# Altium PCB Vector_Mini_ST.PcbDoc (part 1 of 2)
Units mm, origin at the board's own origin, x right, y up, seen from the top; angles counter-clockwise.
Board outline 50 x 50 mm, 4 copper layers (Top Layer, Gnd, Power, Bottom Layer), stack 1.01 mm thick; 146 components, 103 nets, 533 pads, 310 vias.
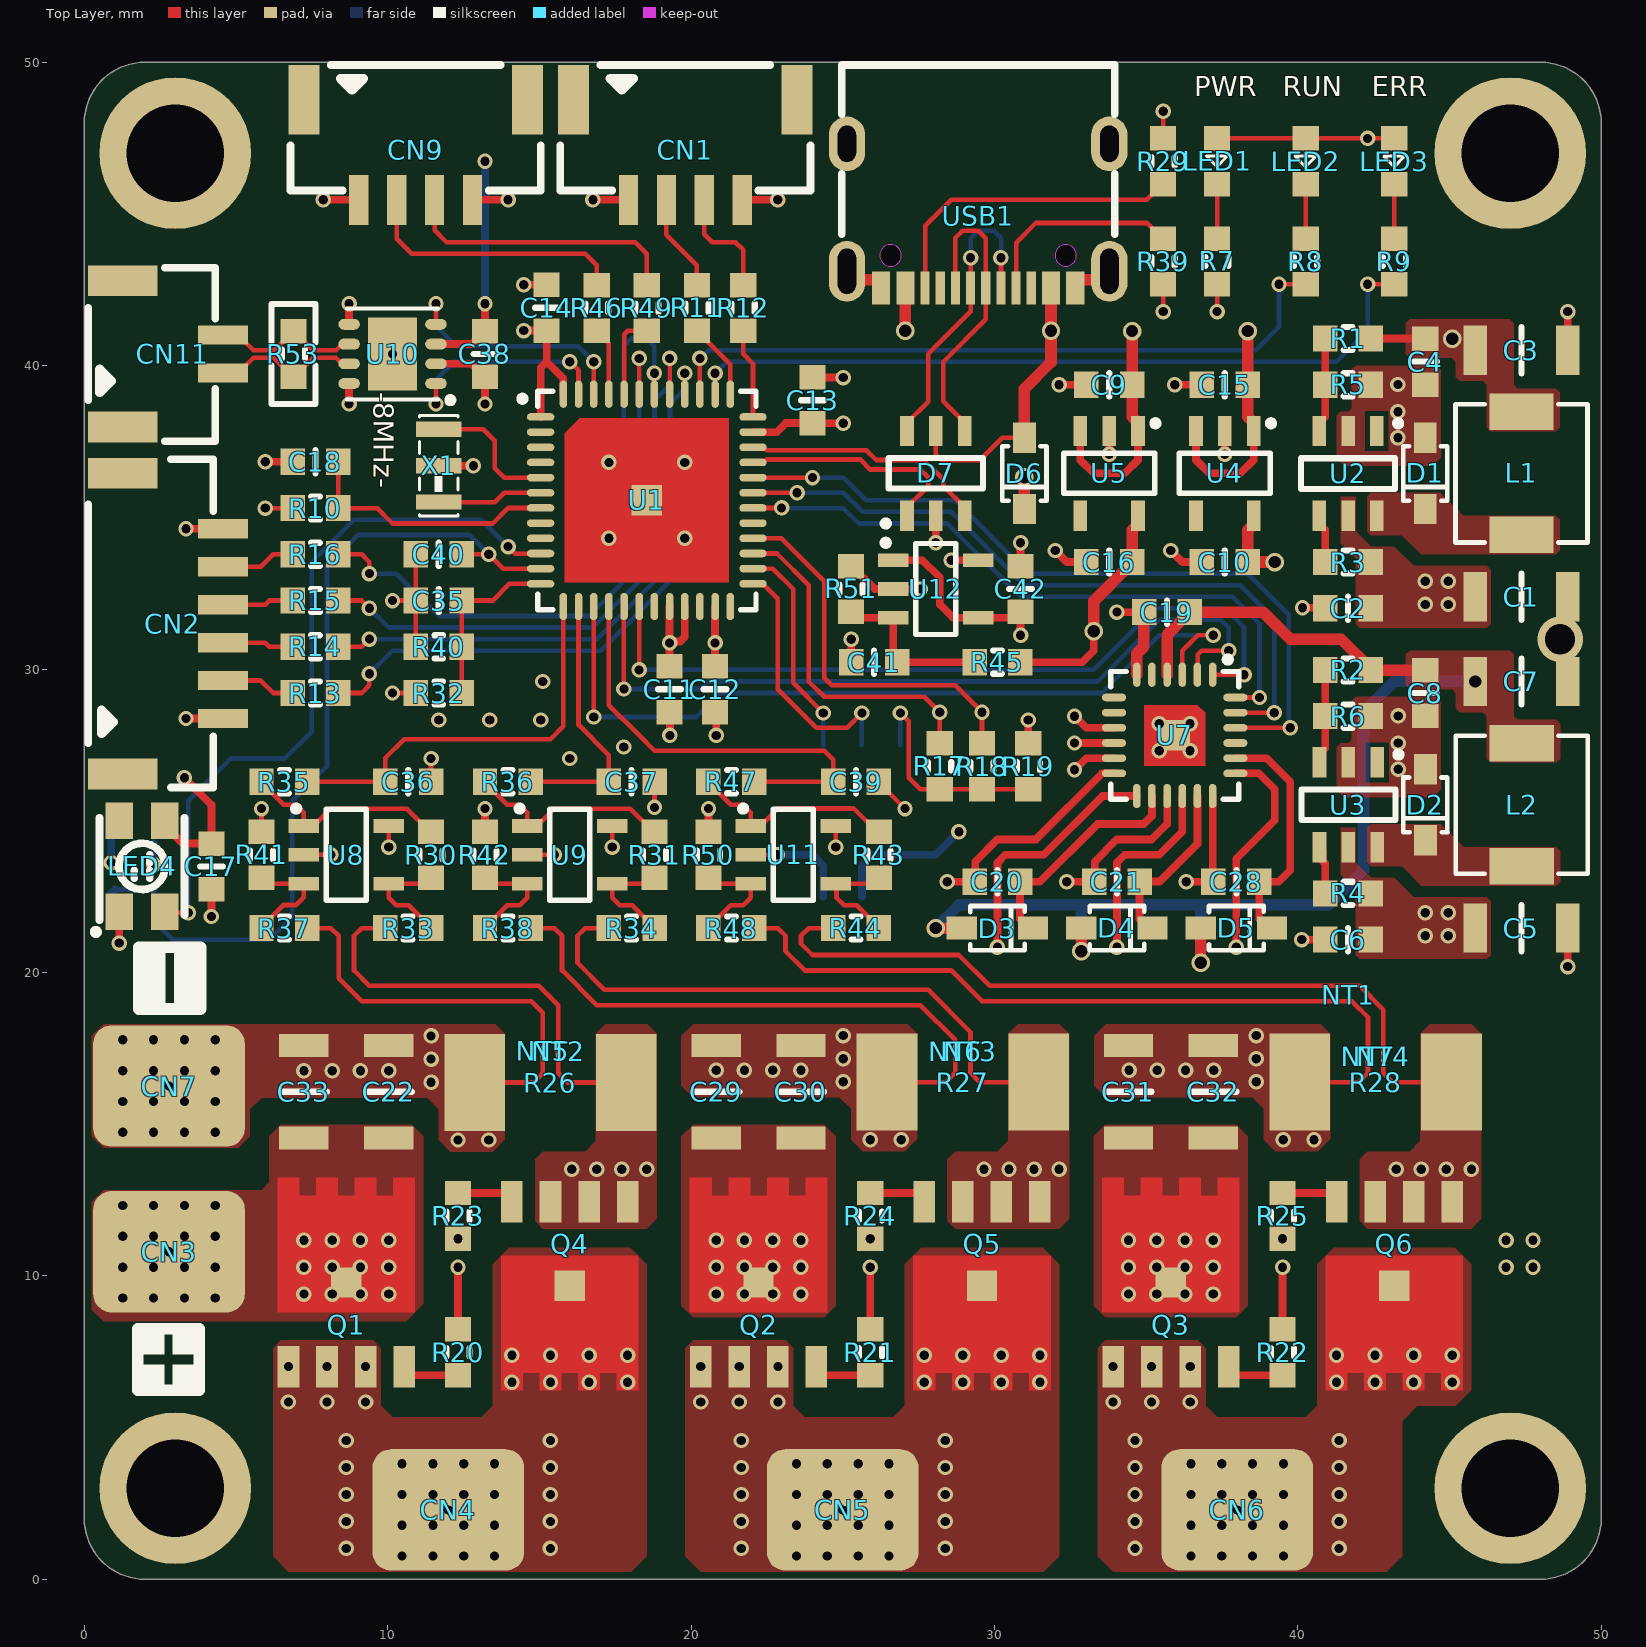
[diagram p0: Top Layer view]
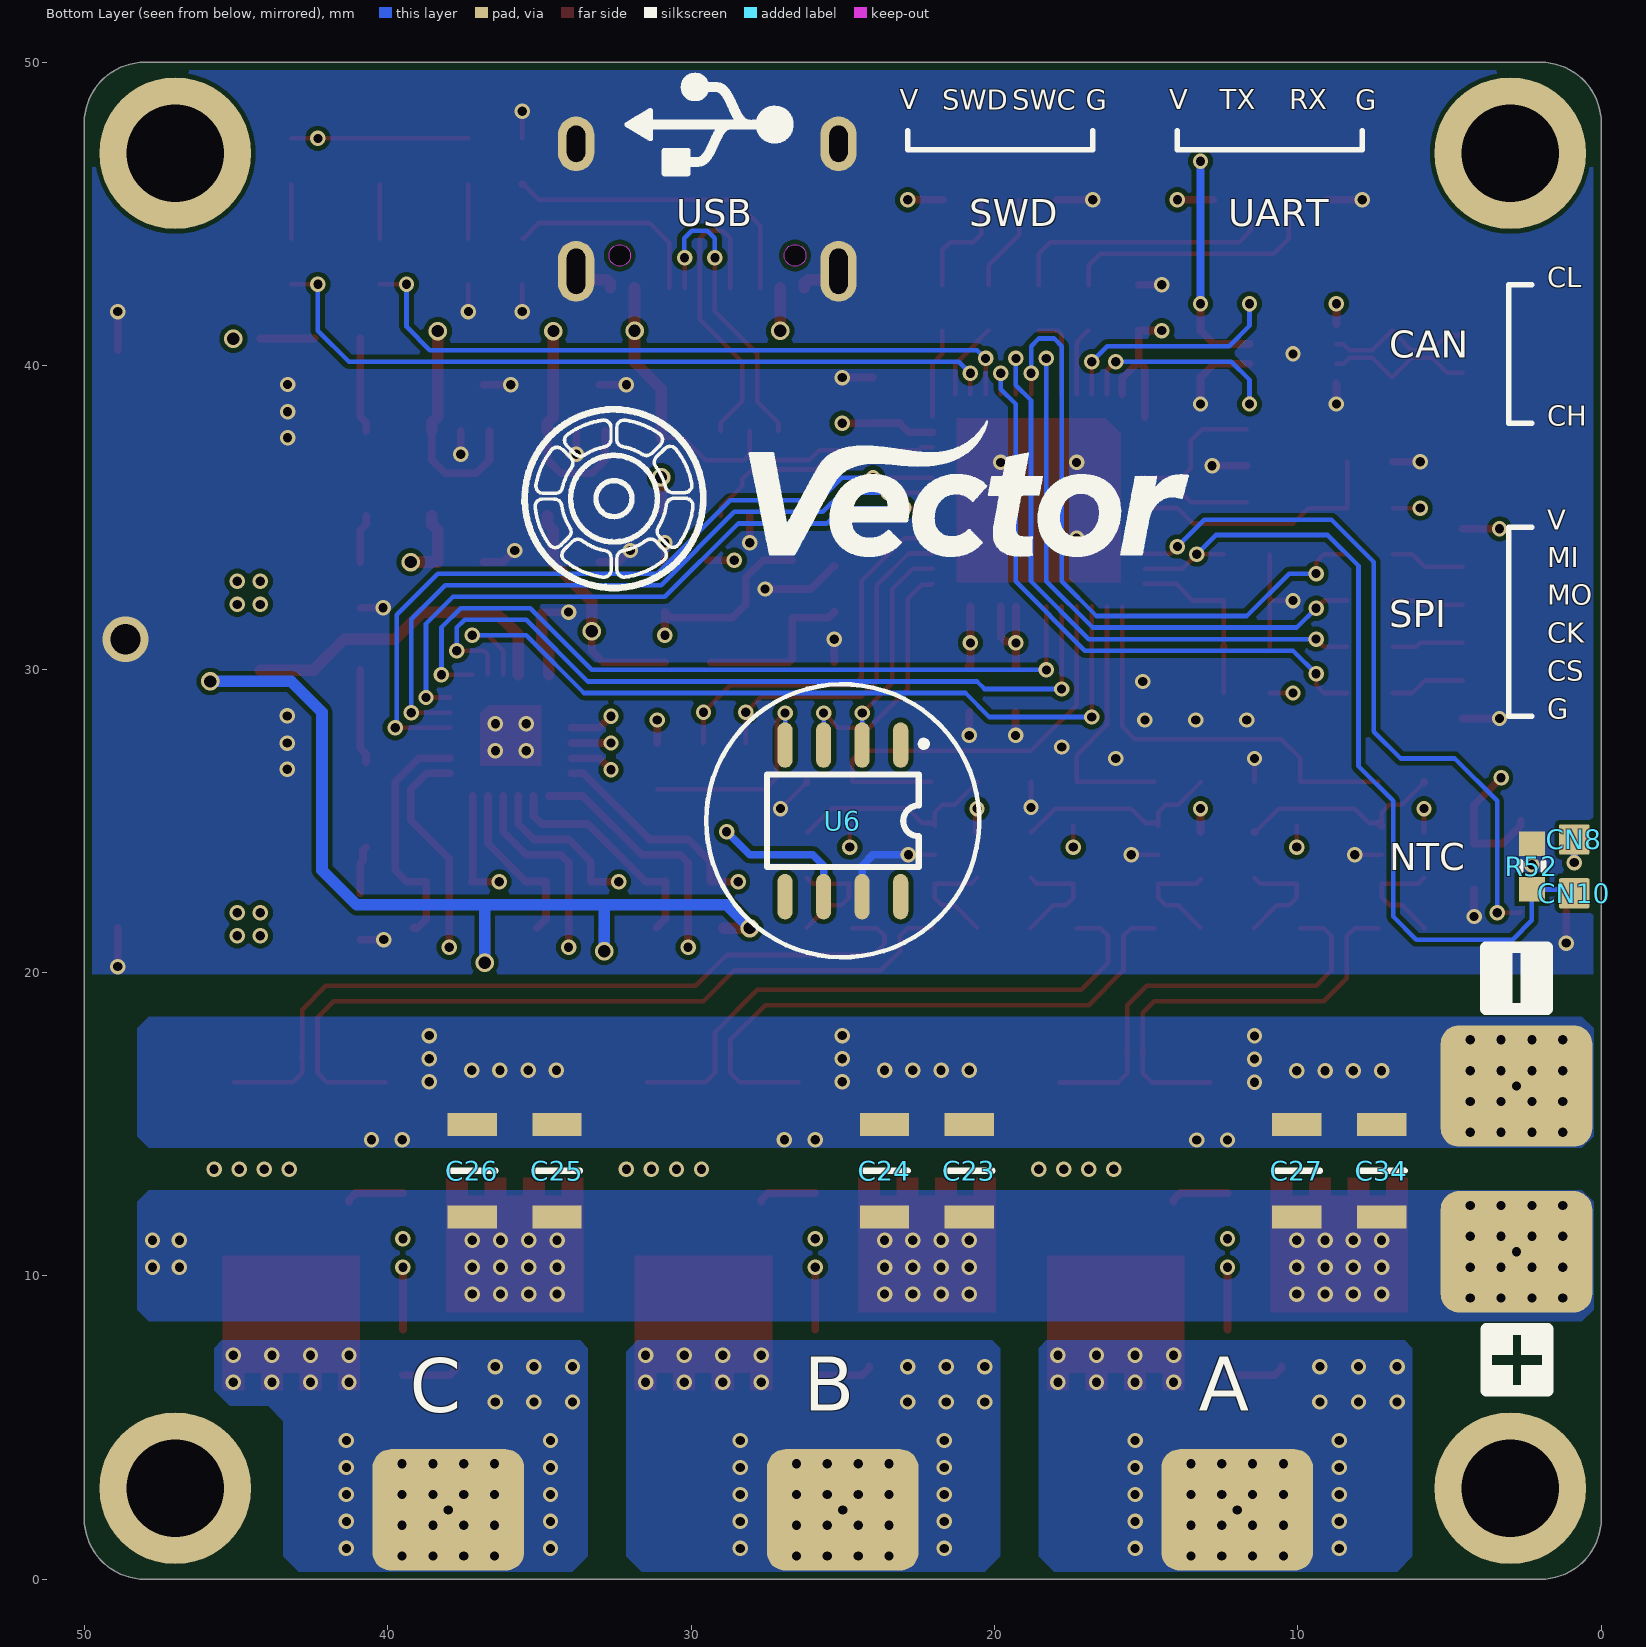
[diagram p1: Bottom Layer view, seen from below]
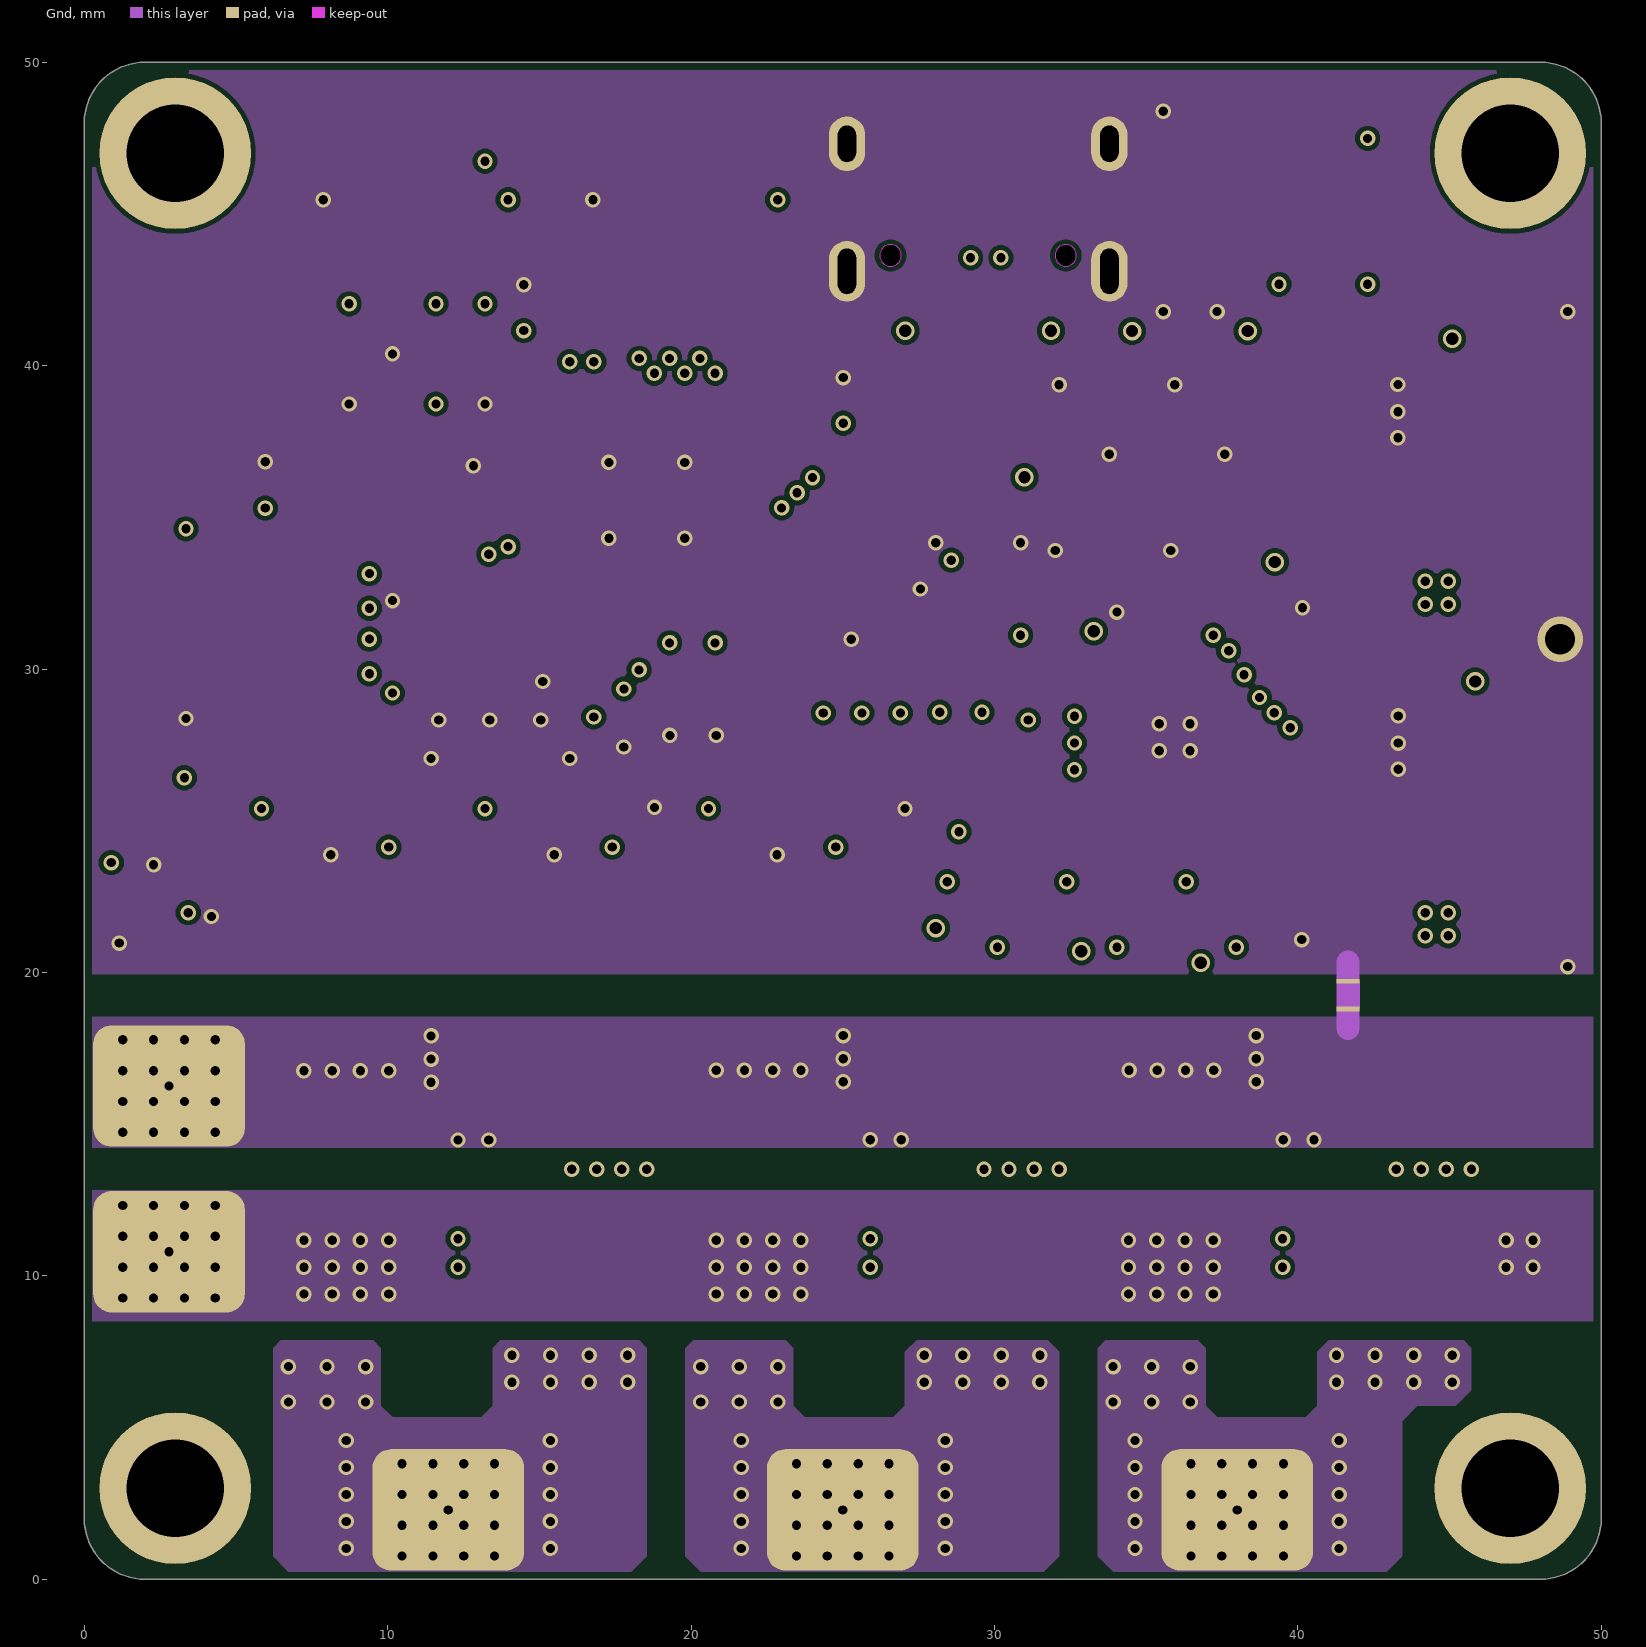
[diagram p2: Gnd]
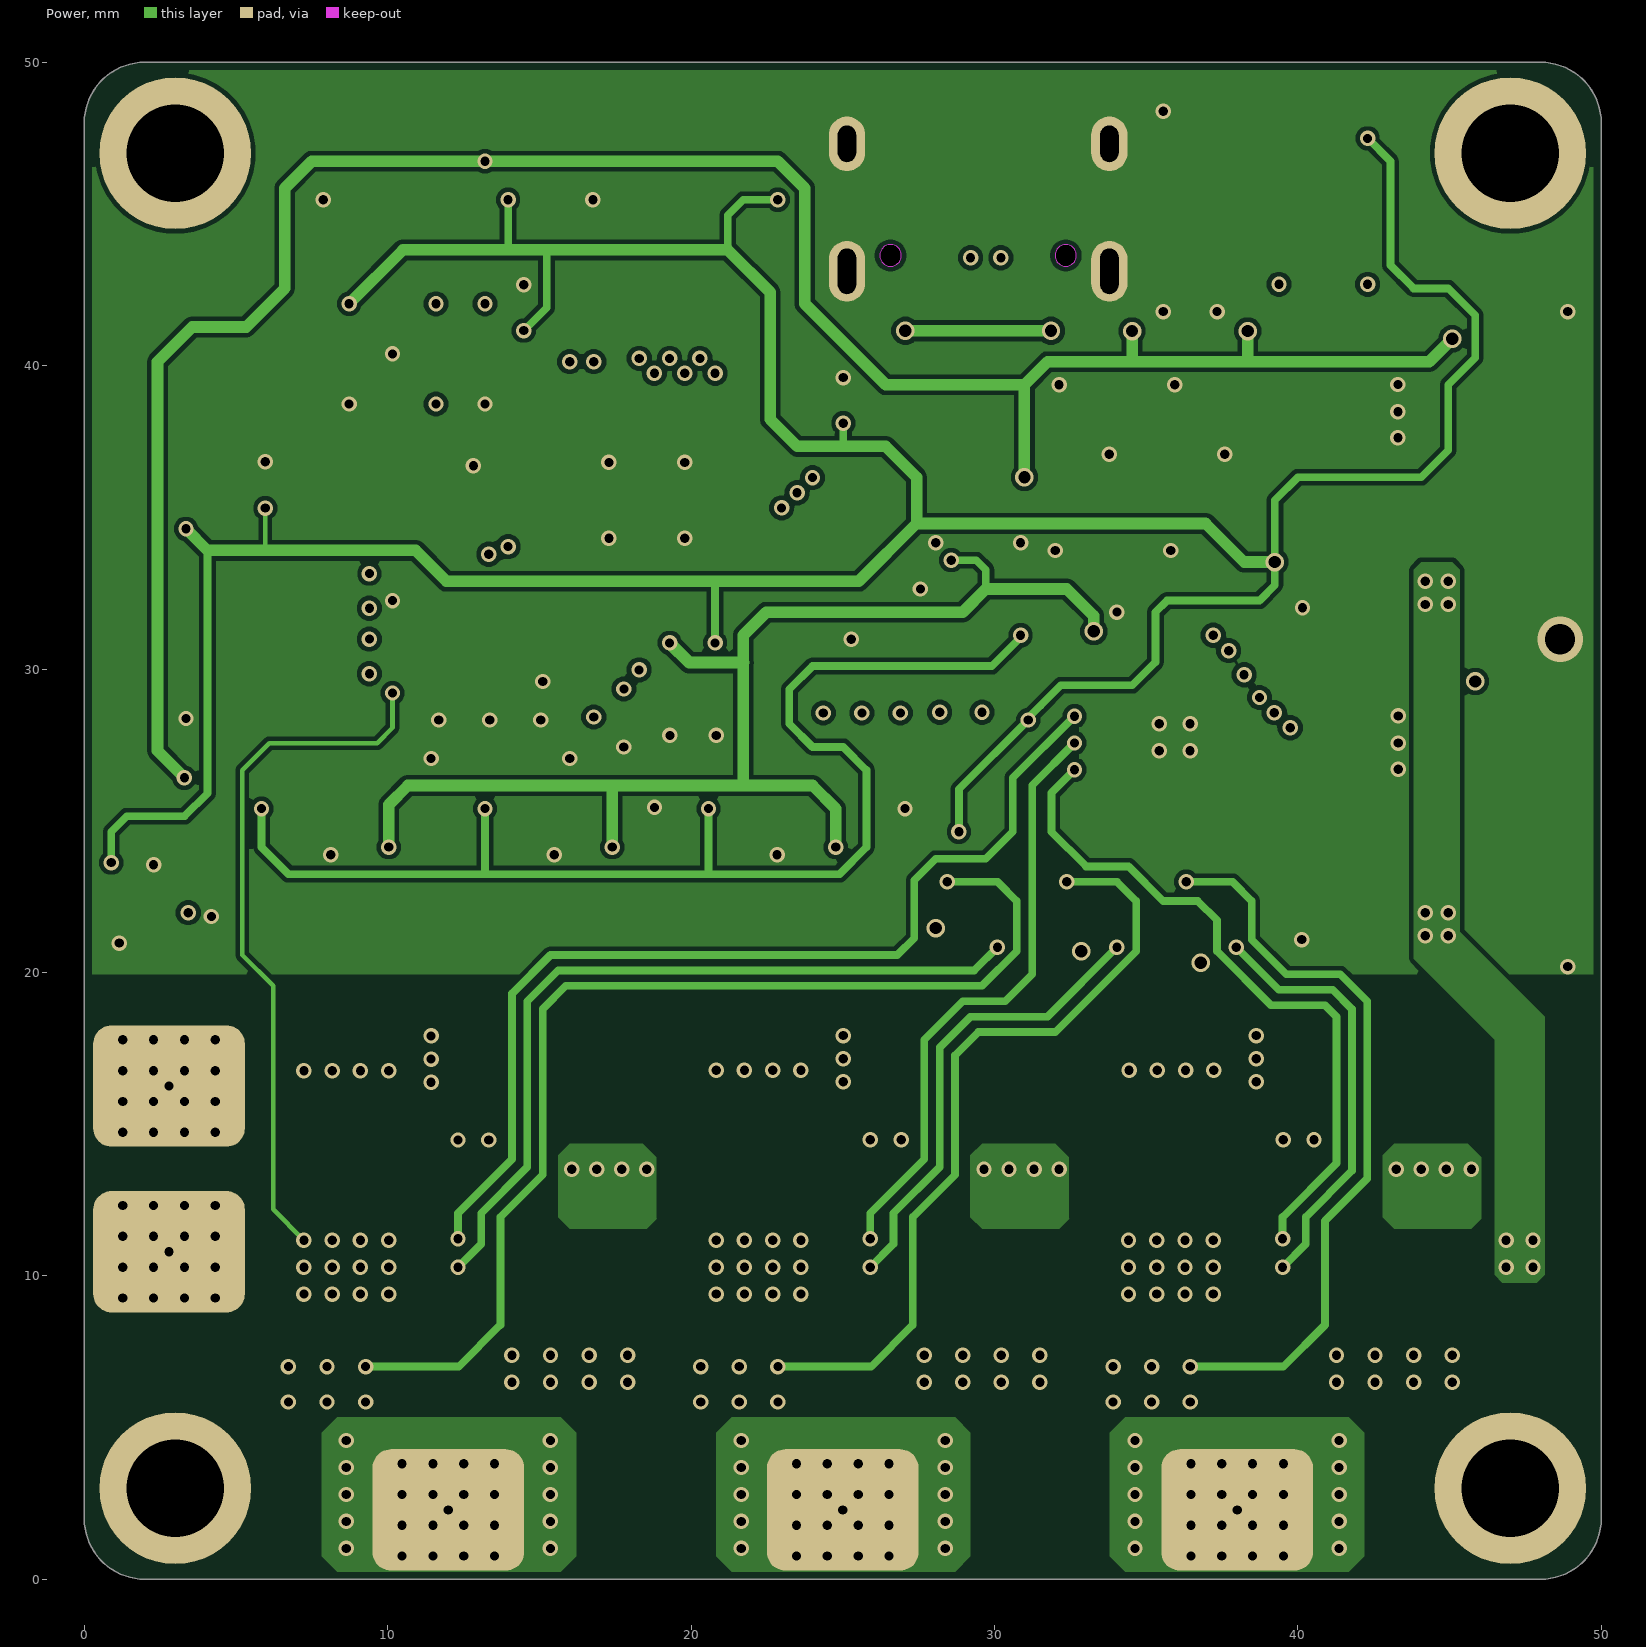
[diagram p3: Power]
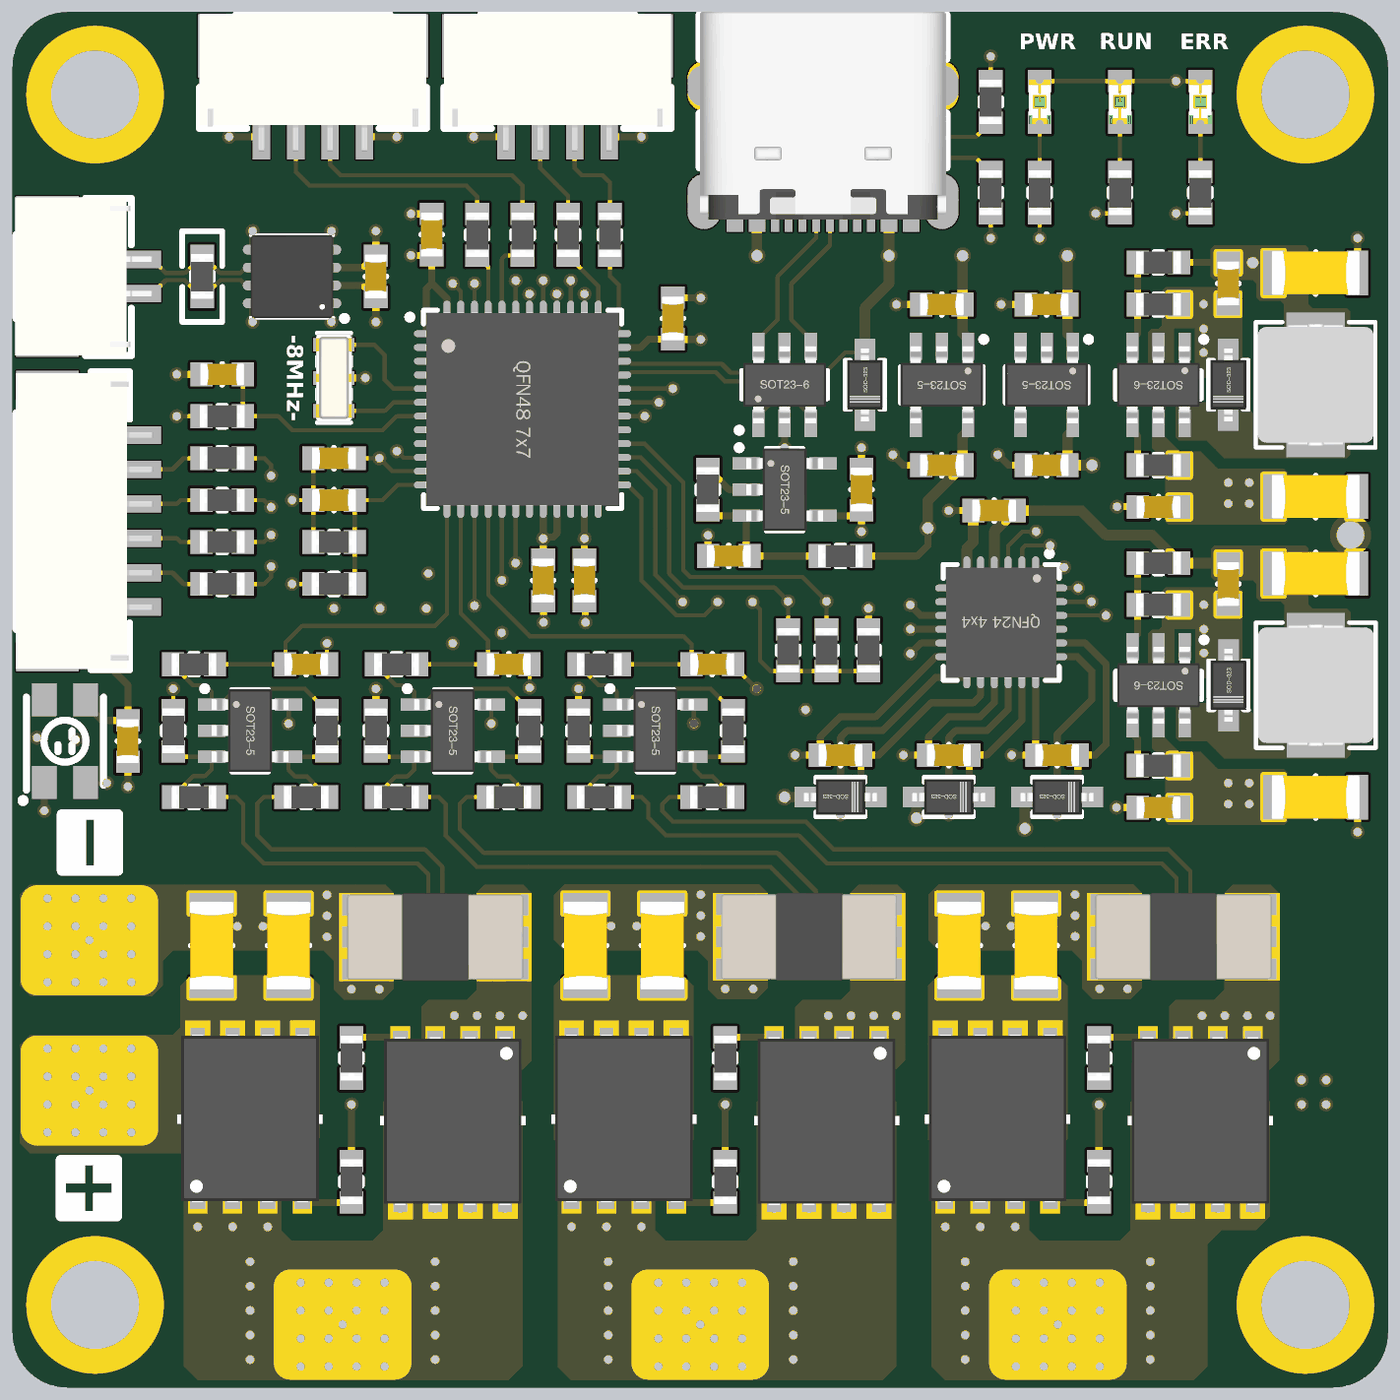
[diagram p5: 3D render of the assembled board from above, using the file's embedded part models]
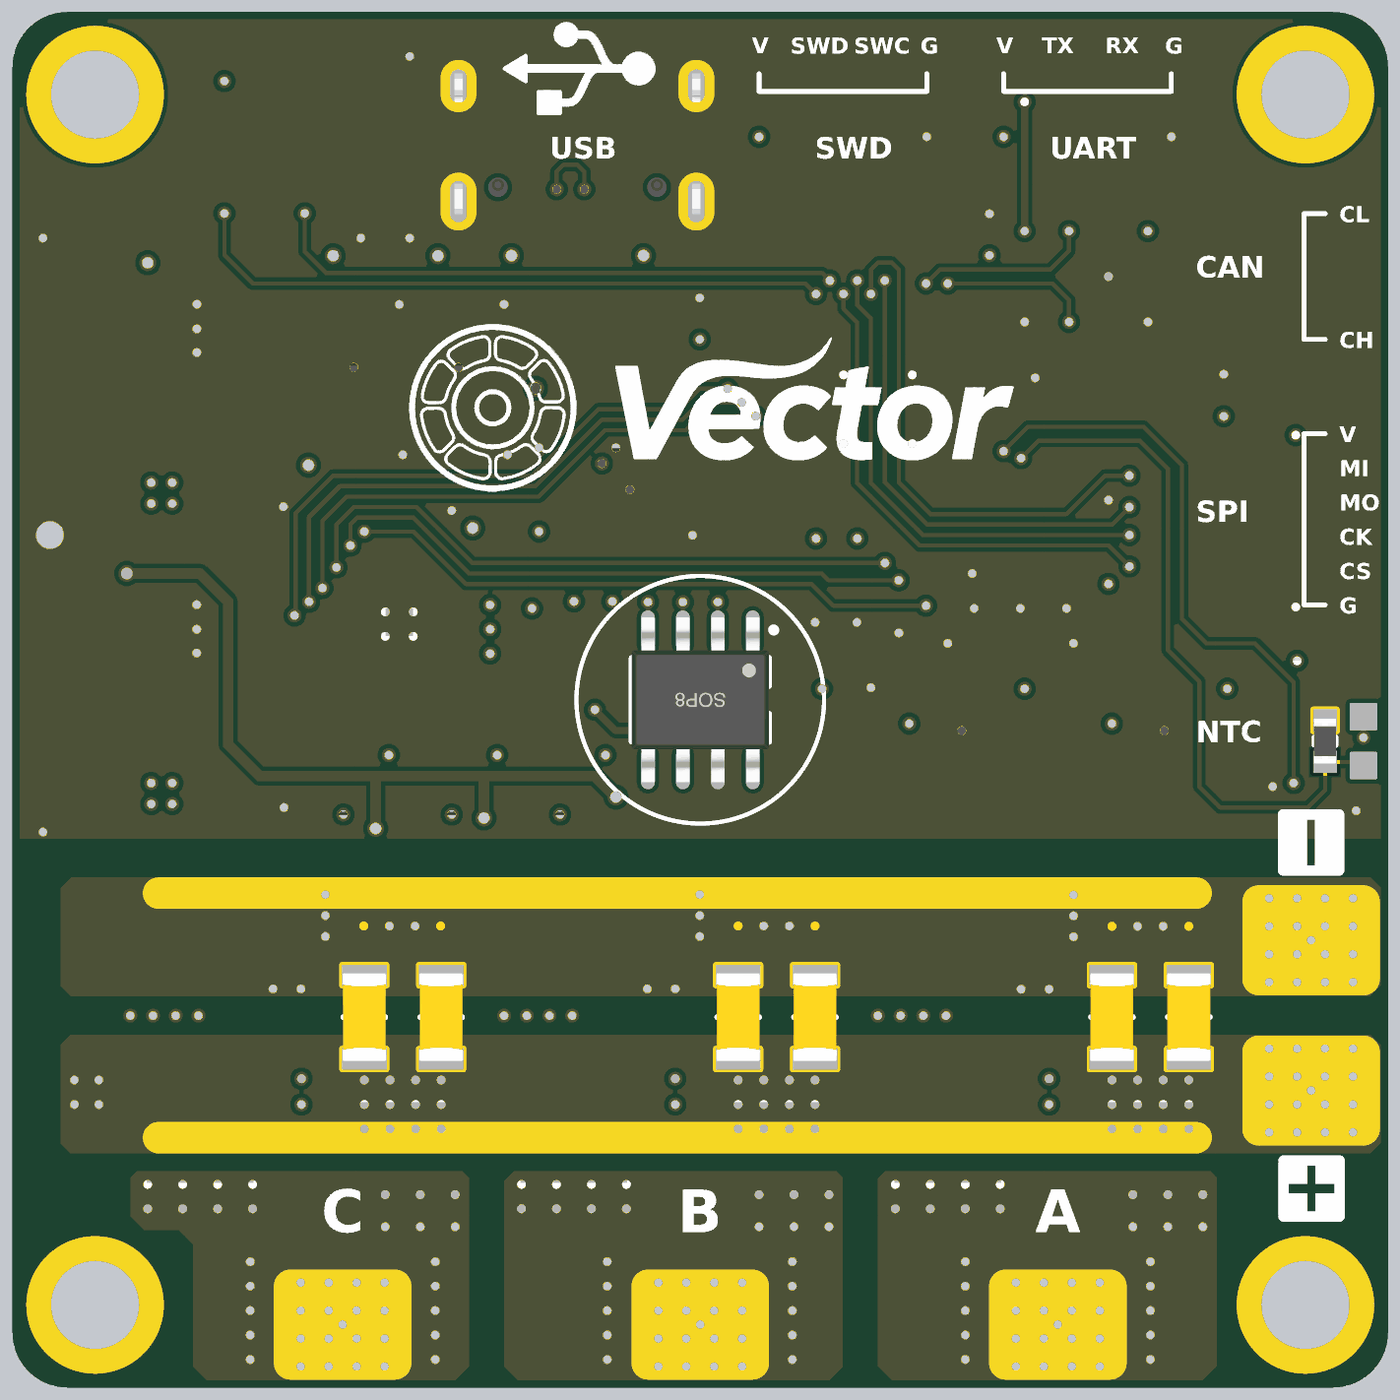
[diagram p6: 3D render of the assembled board from below, using the file's embedded part models]

## Layer stack, top to bottom
Top Solder: solder mask 0.0102, Solder Resist, Dk 3.5
Top Layer: signal copper 0.035
Dielectric 2: prepreg 0.12, PP-006, Dk 4.1
Gnd: signal copper 0.12
Dielectric 1: dielectric 0.46, FR-4, Dk 4.8
Power: signal copper 0.12
Dielectric 3: prepreg 0.12, PP-006, Dk 4.1
Bottom Layer: signal copper 0.035
Bottom Solder: solder mask 0.0102, Solder Resist, Dk 3.5

## Board outline
0,2 0,48 cw(c2,48) 2,50 48,50 cw(c48,48) 50,48 50,2 cw(c48,2) 48,0 2,0 cw(c2,2)

## Design rules (kind name [scope] priority, off if disabled: settings)
BoardOutlineClearance [All] p1: gap=0 ignorepadtopadclearanceinfootprint=FALSE except(0.254: Poly-OutlineEdge)
Clearance [All] p1: gap=0.152 ignorepadtopadclearanceinfootprint=FALSE except(0.102: Arc-Arc Arc-Track Track-Track)
ComponentClearance [All] p1: gap=0 collisioncheckmode=3 verticalgap=0 showdistances=FALSE
Height [All] p1: minheight=0 maxheight=50.8 prefheight=12.7
HoleSize [All] p1: absolutevalues=TRUE maxlimit=12.7 minlimit=0.025 maxpercent=80.000 minpercent=20.000
HoleToHoleClearance [All] p1: gap=0 allowstackedmicrovias=TRUE
MinimumSolderMaskSliver [All] p1: minsoldermaskwidth=0
PolygonConnect PolygonConnect_PGND [InNet('PGND')] p1: connectstyle=Direct reliefconductorwidth=0.254 reliefentries=4 polygonreliefangle="90 Angle" airgapwidth=0.254
PolygonConnect [All] p2: connectstyle=Direct reliefconductorwidth=0.254 reliefentries=4 polygonreliefangle="90 Angle" airgapwidth=0.254
RoutingVias [All] p1: holewidth=0.305 width=0.61 viastyle="Through Hole" minholewidth=0.254 minwidth=0.254 maxholewidth=0.762 maxwidth=1.27
SilkToSilkClearance [All] p1: silktosilkclearance=0
SilkToSolderMaskClearance [IsPad] p1: minsilkscreentomaskgap=0 clearancetoexposedcopper=TRUE
SolderMaskExpansion [IsVia] p1: expansion=0.102 istentingtop=TRUE
Width [All] p1: maxlimit=2.54 minlimit=0.152 preferedwidth=0.254
23 further rules are at their usual default settings.

## Classes and differential pairs
component class Vector_Mini_ST_2: C19 C20 C21 C22 C23 C24 C25 C26 C27 C28 C29 C30 C31 C32 C33 C34 C35 C36 C37 C38 C39 C40 C41 C42 CN3 CN4 CN5 CN6 CN7 CN8 CN9 CN10 CN11 D3 D4 D5 D6 D7 NT2 NT3 NT4 NT5 NT6 NT7 Q1 Q2 Q3 Q4 Q5 Q6 R20 R21 R22 R23 R24 R25 R26 R27 R28 R29 R30 R31 R32 R33 R34 R35 R36 R37 R38 R39 R40 R41 R42 R43 R44 R45 R46 R47 R48 R49 R50 R51 R52 R53 U7 U8 U9 U10 U11 U12 USB1
component class Vector_Mini_ST_1: C1 C2 C3 C4 C5 C6 C7 C8 C9 C10 C11 C12 C13 C14 C15 C16 C17 C18 CN1 CN2 D1 D2 L1 L2 LED1 LED2 LED3 LED4 NT1 R1 R2 R3 R4 R5 R6 R7 R8 R9 R10 R11 R12 R13 R14 R15 R16 R17 R18 R19 U1 U2 U3 U4 U5 U6 X1

## Components (designator, comment, footprint, x,y, rotation, side; value= is the part's Value field where it differs from the comment)
C1 "10u/50V" C1206_S 47.371,32.385 r180 top
C2 "0.1u/50V" C0603_S 41.656,32.004 r180 top
C3 "47u/10V" C1206_S 47.371,40.513 r180 top
C4 "0.1u/50V" C0603_S 44.196,40.132 r270 top
C5 "10u/50V" C1206_S 47.371,21.463 r180 top
C6 "0.1u/50V" C0603_S 41.656,21.082 r180 top
C7 "22u/25V" C1206_S 47.371,29.591 r180 top
C8 "0.1u/50V" C0603_S 44.196,29.21 r270 top
C9 "1u/25V" C0603_S 33.782,39.37 r180 top
C10 "1u/25V" C0603_S 37.592,33.528 r180 top
C11 "0.1u/50V" C0603_S 19.292,29.337 r270 top
C12 "0.1u/50V" C0603_S 20.792,29.337 r270 top
C13 "0.1u/50V" C0603_S 24.003,38.862 r90 top
C14 "0.1u/50V" C0603_S 15.24,41.91 r90 top
C15 "1u/25V" C0603_S 37.592,39.37 r180 top
C16 "1u/25V" C0603_S 33.782,33.528 r180 top
C17 "0.1u/50V" C0603_S 4.191,23.495 r270 top
C18 "0.1u/50V" C0603_S 7.62,36.83 r0 top
C19 "10u/16V" C0603_S 35.687,31.877 r180 top
C20 "2.2u/25V" C0603_S 30.099,22.987 r0 top
C21 "2.2u/25V" C0603_S 34.036,22.987 r0 top
C22 "10u/50V" C1206_S 10.033,16.067 r270 top
C23 "10u/50V" C1206_S 20.828,13.462 r270 bottom
C24 "10u/50V" C1206_S 23.622,13.462 r270 bottom
C25 "10u/50V" C1206_S 34.417,13.462 r270 bottom
C26 "10u/50V" C1206_S 37.211,13.462 r270 bottom
C27 "10u/50V" C1206_S 10.033,13.462 r270 bottom
C28 "2.2u/25V" C0603_S 37.973,22.987 r0 top
C29 "10u/50V" C1206_S 20.828,16.067 r270 top
C30 "10u/50V" C1206_S 23.622,16.067 r270 top
C31 "10u/50V" C1206_S 34.417,16.067 r270 top
C32 "10u/50V" C1206_S 37.211,16.067 r270 top
C33 "10u/50V" C1206_S 7.239,16.067 r270 top
C34 "10u/50V" C1206_S 7.239,13.462 r270 bottom
C35 "0.1u/50V" C0603_S 11.684,32.258 r0 top
C36 "1n/50V" C0603_S 10.676,26.289 r180 top
C37 "1n/50V" C0603_S 18.042,26.289 r180 top
C38 "0.1u/50V" C0603_S 13.208,40.386 r270 top
C39 "1n/50V" C0603_S 25.437,26.289 r180 top
C40 "0.1u/50V" C0603_S 11.684,33.782 r180 top
C41 "1n/50V" C0603_S 26.035,30.226 r0 top
C42 "0.1u/50V" C0603_S 30.861,32.639 r270 top
CN1 "GH1.25-4P" GH1.25-WS-4P 19.812,47.117 r0 top
CN2 "GH1.25-6P" GH1.25-WS-6P 2.921,31.496 r90 top
CN3 "PAD 5*4" "PAD 5*4" 2.794,10.795 r180 top
CN4 "PAD 5*4" "PAD 5*4" 12,2.286 r0 top
CN5 "PAD 5*4" "PAD 5*4" 25,2.286 r0 top
CN6 "PAD 5*4" "PAD 5*4" 38,2.286 r0 top
CN7 "PAD 5*4" "PAD 5*4" 2.794,16.256 r180 top
CN8 "PAD 1*1" "PAD 1*1" 0.889,24.384 r90 bottom
CN9 "GH1.25-4P" GH1.25-WS-4P 10.922,47.117 r0 top
CN10 "PAD 1*1" "PAD 1*1" 0.889,22.606 r90 bottom
CN11 "GH1.25-2P" GH1.25-WS-2P 2.921,40.386 r90 top
D1 "1N5819WS" SOD-323 44.196,36.449 r90 top
D2 "1N5819WS" SOD-323 44.204,25.527 r90 top
D3 "1N5819WS" SOD-323 30.099,21.463 r180 top
D4 "1N5819WS" SOD-323 34.036,21.463 r180 top
D5 "1N5819WS" SOD-323 37.973,21.463 r180 top
D6 "1N5819WS" SOD-323 30.988,36.449 r90 top
D7 "USBLC6-2SC6" SOT-23-6 28.067,36.449 r0 top
L1 "10u/1.5A" SMD-0420 47.371,36.449 r90 top
L2 "10u/1.5A" SMD-0420 47.379,25.527 r90 top
LED1 "LED-0603-B" LED-0603-B 37.338,46.736 r270 top
LED2 "LED-0603-G" LED-0603-G 40.259,46.736 r270 top
LED3 "LED-0603-R" LED-0603-R 43.18,46.736 r270 top
LED4 "WS2812B-3528" LED-3528-4P 1.905,23.495 r270 top
NT1 "NetTie_30mil" NETTIE30MIL 41.656,19.253 r270 top net-tie
NT2 "NetTie_6mil" Nettie6mil 15.621,17.399 r270 top net-tie
NT3 "NetTie_6mil" Nettie6mil 29.21,17.399 r270 top net-tie
NT4 "NetTie_6mil" Nettie6mil 42.819,17.22 r270 top net-tie
NT5 "NetTie_6mil" Nettie6mil 15.113,17.399 r270 top net-tie
NT6 "NetTie_6mil" Nettie6mil 28.702,17.41 r270 top net-tie
NT7 "NetTie_6mil" Nettie6mil 42.311,17.22 r270 top net-tie
Q1 "CSD18540Q5B" VSON-8 8.636,9.779 r90 top
Q2 "CSD18540Q5B" VSON-8 22.225,9.779 r90 top
Q3 "CSD18540Q5B" VSON-8 35.814,9.779 r90 top
Q4 "CSD18540Q5B" VSON-8 16.002,9.677 r270 top
Q5 "CSD18540Q5B" VSON-8 29.591,9.677 r270 top
Q6 "CSD18540Q5B" VSON-8 43.18,9.677 r270 top
R1 "470k" R0603_S 41.656,40.894 r0 top
R2 "69.8k" R0603_S 41.656,29.972 r0 top
R3 "100k" R0603_S 41.656,33.528 r180 top
R4 "100k" R0603_S 41.656,22.606 r180 top
R5 "91k" R0603_S 41.656,39.37 r180 top
R6 "5.1k" R0603_S 41.656,28.448 r180 top
R7 "1k" R0603_S 37.338,43.434 r270 top
R8 "2k" R0603_S 40.259,43.434 r270 top
R9 "510R" R0603_S 43.18,43.434 r270 top
R10 "10k" R0603_S 7.62,35.306 r180 top
R11 "22R" R0603_S 20.193,41.902 r90 top
R12 "22R" R0603_S 21.717,41.902 r90 top
R13 "22R" R0603_S 7.62,29.21 r180 top
R14 "22R" R0603_S 7.62,30.734 r180 top
R15 "22R" R0603_S 7.62,32.258 r180 top
R16 "22R" R0603_S 7.62,33.782 r180 top
R17 "22R" R0603_S 28.194,26.797 r270 top
R18 "22R" R0603_S 29.591,26.797 r270 top
R19 "2k" R0603_S 31.115,26.797 r90 top
R20 "1R" R0603_S 12.319,7.481 r270 top
R21 "1R" R0603_S 25.908,7.481 r270 top
R22 "1R" R0603_S 39.497,7.481 r270 top
R23 "1R" R0603_S 12.319,11.976 r90 top
R24 "1R" R0603_S 25.908,11.976 r90 top
R25 "1R" R0603_S 39.497,11.976 r90 top
R26 "2mR" R2512_S 15.367,16.372 r0 top
R27 "2mR" R2512_S 28.956,16.383 r0 top
R28 "2mR" R2512_S 42.565,16.383 r0 top
R29 "5.1k" R0603_S 35.56,46.736 r270 top
R30 "10k 0.1%" R0603_S 11.43,23.876 r90 top
R31 "10k 0.1%" R0603_S 18.796,23.876 r90 top
R32 "10k" R0603_S 11.684,29.21 r180 top
R33 "1k 0.1%" R0603_S 10.676,21.463 r0 top
R34 "1k 0.1%" R0603_S 18.042,21.463 r0 top
R35 "100R" R0603_S 6.596,26.289 r0 top
R36 "100R" R0603_S 13.962,26.289 r0 top
R37 "1k 0.1%" R0603_S 6.596,21.463 r180 top
R38 "1k 0.1%" R0603_S 13.962,21.463 r180 top
R39 "5.1k" R0603_S 35.56,43.434 r90 top
R40 "1k" R0603_S 11.684,30.734 r0 top
R41 "10k 0.1%" R0603_S 5.842,23.876 r270 top
R42 "10k 0.1%" R0603_S 13.208,23.876 r270 top
R43 "10k 0.1%" R0603_S 26.191,23.876 r90 top
R44 "1k 0.1%" R0603_S 25.436,21.463 r0 top
R45 "10k 0.1%" R0603_S 30.099,30.226 r0 top
R46 "22R" R0603_S 16.891,41.902 r90 top
R47 "100R" R0603_S 21.328,26.289 r0 top
R48 "1k 0.1%" R0603_S 21.328,21.463 r180 top
R49 "22R" R0603_S 18.542,41.902 r90 top
R50 "10k 0.1%" R0603_S 20.574,23.876 r270 top
R51 "10k 0.1%" R0603_S 25.273,32.639 r270 top
R52 "3.3k" R0603_S 2.286,23.495 r270 bottom
R53 "120R" R0603_S 6.894,40.386 r90 top
U1 "STM32G431CBU6" QFN-48 18.542,35.56 r270 top
U2 "TX4137" SOT-23-6 41.656,36.449 r180 top
U3 "TX4137" SOT-23-6 41.664,25.527 r180 top
U4 "TLV75733PDBVR" SOT-23-5 37.592,36.449 r180 top
U5 "LP5907QMFX-3.3Q1" SOT-23-5 33.782,36.449 r180 top
U6 "TLE5012BE1000" SOP-8 24.996,24.996 r270 bottom
U7 "FD6288Q" QFN-24 35.941,27.813 r180 top
U8 "RS721XF" SOT-23-5 8.636,23.876 r270 top
U9 "RS721XF" SOT-23-5 16.002,23.876 r270 top
U10 "TJA1051TK/3/1J" VDFN-8 10.16,40.386 r90 top
U11 "RS721XF" SOT-23-5 23.368,23.876 r270 top
U12 "RS721XF" SOT-23-5 28.067,32.639 r270 top
USB1 "TYPEC-WS-16P" TYPEC-WS-16P 29.464,44.936 r180 top
X1 "8M" OSC-3213-3P 11.684,36.703 r90 top

## Footprints (in the part's own frame and the unit in brackets; to place one, negate y for a bottom-side part, rotate by r counter-clockwise, add the part's x,y. Pads: shape width x height; smd on the part's side, far side on the other; paste and mask are expansions set on the pad)
C0603_S [mm]
  rect 0.806x0.864 smd paste+0 mask+0.102: 1(-0.754,0) 2(0.754,0)
  silkscreen extent 0,-0.38 0,0.38, body extent -0.8,-0.4 0.8,0.4, height 0.8
C1206_S [mil]
  rect 30x64 smd paste+0 mask+4: 1(60,0) 2(-60,0)
  silkscreen extent 0,-30 0,30, body extent -63,-31 63,31, height 51
GH1.25-WS-2P [mil]
  rect 40x90 smd paste+0 mask+1.97: 0(-95,65) 0(95,65)
  rect 25x65 smd paste+0 mask+1.97: 1(-24.6,-65) 2(24.61,-65)
  silkscreen extent -113,-55 112,110, body extent -113,-86 113,111, height 171
GH1.25-WS-4P [mil]
  rect 40x90 smd paste+0 mask+1.97: 0(-145,65) 0(145,65)
  rect 25x65 smd paste+0 mask+1.97: 1(-73.82,-65) 2(-24.6,-65) 3(24.61,-65) 4(73.82,-65)
  silkscreen extent -162,-53 162,110, body extent -162,-86 162,111, height 171
GH1.25-WS-6P [mil]
  rect 40x90 smd paste+0 mask+1.97: 0(-195.08,65) 0(195.08,65)
  rect 25x65 smd paste+0 mask+1.97: 1(-123.03,-65) 2(-73.82,-65) 3(-24.61,-65) 4(24.61,-65) 5(73.82,-65) 6(123.03,-65)
  silkscreen extent -213,-52 214,110, body extent -212,-86 212,111, height 171
LED-0603-B [mm]
  rect 0.806x0.864 smd paste+0 mask+0.102: 1(-0.754,0) 2(0.754,0)
  silkscreen extent -0.17,-0.35 0.18,0.33, body extent -0.8,-0.4 0.8,0.4, height 0.47
LED-0603-G [mm]
  rect 0.806x0.864 smd paste+0 mask+0.102: 1(-0.754,0) 2(0.754,0)
  silkscreen extent -0.17,-0.35 0.18,0.33, body extent -0.8,-0.4 0.8,0.4, height 0.47
LED-0603-R [mm]
  rect 0.806x0.864 smd paste+0 mask+0.102: 1(-0.754,0) 2(0.754,0)
  silkscreen extent -0.17,-0.35 0.18,0.33, body extent -0.8,-0.4 0.8,0.4, height 0.47
LED-3528-4P [mm]
  rect 1.2x0.9 smd: 1(1.5,-0.75) 2(1.5,0.75) 3(-1.5,0.75) 4(-1.5,-0.75)
  silkscreen extent -1.6,-1.62 2.26,1.4, body extent -1.75,-1.4 1.75,1.4, height 1.95
Nettie6mil [mil]
  rect 4x6 smd paste-6 mask-6: 1(-5,0) 2(5,0)
  Top Layer region: -5,3 5,3 5,-3 -5,-3
NETTIE30MIL [mil]
  rect 6x30 on Mid1 paste-6 mask-6: 1(-18,0) 2(18,0)
  Gnd region: -18,15 18,15 18,-15 -18,-15
OSC-3213-3P [mm]
  rect 0.5x1.5 smd paste+0 mask+0.05: 1(-1.2,0) 2(0,0) 3(1.2,0)
  silkscreen extent -1.65,-0.64 1.65,0.64, body extent -1.6,-0.66 1.6,0.66, height 0.81
"PAD 1*1" [mm]
  rrect10% 1x1 smd: 1(0,0)
"PAD 5*4" [mil]
  round 20 hole 12: 1(-60,60) 1(-60,-20) 1(-60,20) 1(-60,-60) 1(-20,60) 1(-20,20) 1(-20,-20) 1(-20,-60) 1(20,60) 1(20,20) 1(20,-20) 1(20,-60) 1(60,60) 1(60,-20) 1(60,20) 1(60,-60)
  rrect30% 196.85x157.48 hole 12: 1(0,0)
QFN-24 [mm]
  oval 0.25x0.8 smd: 1(-1.25,-2) 2(-0.75,-2) 3(-0.25,-2) 4(0.25,-2) 5(0.75,-2) 6(1.25,-2) 13(1.25,2) 14(0.75,2) 15(0.25,2) 16(-0.25,2) 17(-0.75,2) 18(-1.25,2)
  oval 0.8x0.25 smd: 7(2,-1.25) 8(2,-0.75) 9(2,-0.25) 10(2,0.25) 11(2,0.75) 12(2,1.25) 19(-2,1.25) 20(-2,0.75) 21(-2,0.25) 22(-2,-0.25) 23(-2,-0.75) 24(-2,-1.25)
  rect 1x1 smd: 25(0,0)
  Top Layer region: -1,1 1,1 1,-1 -0.75,-1 -1,-0.75
  silkscreen extent -2.11,-2.6 2.11,2.11, body extent -2.01,-2.01 2.01,2.01, height 0.95
QFN-48 [mm]
  oval 0.25x0.9 smd: 1(-2.75,-3.5) 2(-2.25,-3.5) 3(-1.75,-3.5) 4(-1.25,-3.5) 5(-0.75,-3.5) 6(-0.25,-3.5) 7(0.25,-3.5) 8(0.75,-3.5) 9(1.25,-3.5) 10(1.75,-3.5) 11(2.25,-3.5) 12(2.75,-3.5) 25(2.75,3.5) 26(2.25,3.5) 27(1.75,3.5) 28(1.25,3.5) 29(0.75,3.5) 30(0.25,3.5) 31(-0.25,3.5) 32(-0.75,3.5) 33(-1.25,3.5) 34(-1.75,3.5) 35(-2.25,3.5) 36(-2.75,3.5)
  oval 0.9x0.25 smd: 13(3.5,-2.75) 14(3.5,-2.25) 15(3.5,-1.75) 16(3.5,-1.25) 17(3.5,-0.75) 18(3.5,-0.25) 19(3.5,0.25) 20(3.5,0.75) 21(3.5,1.25) 22(3.5,1.75) 23(3.5,2.25) 24(3.5,2.75) 37(-3.5,2.75) 38(-3.5,2.25) 39(-3.5,1.75) 40(-3.5,1.25) 41(-3.5,0.75) 42(-3.5,0.25) 43(-3.5,-0.25) 44(-3.5,-0.75) 45(-3.5,-1.25) 46(-3.5,-1.75) 47(-3.5,-2.25) 48(-3.5,-2.75)
  rect 1x1 smd mask+0.051: 49(0,0)
  Top Layer region: -2.7,2.7 2.7,2.7 2.7,-2.7 -2.214,-2.7 -2.7,-2.214
  silkscreen extent -3.6,-4.2 3.6,3.6, body extent -3.51,-3.51 3.51,3.51, height 0.95
R0603_S [mm]
  rect 0.806x0.864 smd paste+0 mask+0.102: 1(-0.754,0) 2(0.754,0)
  silkscreen extent -0.14,-0.38 0.14,0.38, body extent -0.81,-0.4 0.81,0.4, height 0.44
R2512_S [mm]
  rect 2x3.2 smd paste-2.54: 1(-2.5,0) 2(2.5,0)
  body extent -3.2,-1.6 3.2,1.6, height 0.7
SMD-0420 [mm]
  rect 1.2x2.12 smd: 1(-2.028,0) 2(2.028,0)
  silkscreen extent -2.28,-2.18 2.28,2.18, body extent -2.2,-2.1 2.2,2.1, height 2.1
SOD-323 [mm]
  rect 1x0.75 smd: 1(-1.173,0) 2(1.173,0)
  silkscreen extent -0.9,-0.73 0.9,0.73, body extent -1.32,-0.65 1.32,0.65, height 0.95
SOP-8 [mm]
  oval 1.5x0.5 smd: 1(-2.5,1.905) 2(-2.5,0.635) 3(-2.5,-0.635) 4(-2.5,-1.905) 5(2.5,-1.905) 6(2.5,-0.635) 7(2.5,0.635) 8(2.5,1.905)
  silkscreen extent -2.64,-2.5 1.52,2.77, body extent -3,-2.5 3,2.5, height 1.9
SOT-23-5 [mm]
  rect 0.45x1 smd: 1(-0.95,-1.4) 2(0,-1.4) 3(0.95,-1.4) 4(0.95,1.4) 5(-0.95,1.4)
  silkscreen extent -1.62,-1.75 1.5,0.66, body extent -1.5,-1.4 1.5,1.4, height 1.15
SOT-23-6 [mm]
  rect 0.45x1 smd: 1(-0.95,-1.397) 2(0,-1.397) 3(0.95,-1.397) 4(0.95,1.397) 5(0,1.397) 6(-0.95,1.397)
  silkscreen extent -1.75,-1.75 1.55,0.51, body extent -1.5,-1.4 1.5,1.4, height 1.15
TYPEC-WS-16P [mm]
  rect 0.6x1.1 smd paste-100 mask+0.05: 1(-3.2,2.375) 2(-2.4,2.375) 11(2.4,2.375) 12(3.2,2.375)
  rect 0.3x1.1 smd paste-100 mask+0.05: 3(-1.75,2.375) 4(-1.25,2.375) 5(-0.75,2.375) 6(-0.25,2.375) 7(0.25,2.375) 8(0.75,2.375) 9(1.25,2.375) 10(1.75,2.375)
  oval 1.2x1.8 hole 0.6 slot 1.2 at 90 deg paste+0 mask+0.05: 13(-4.325,-2.375) 14(4.325,-2.375)
  oval 1.2x2 hole 0.6 slot 1.5 at 90 deg paste+0 mask+0.05: 13(-4.325,1.825) 14(4.325,1.825)
  Keep-Out Layer board cut-out: -2.54,1.305 -2.54,1.375 -2.593,1.503 -2.692,1.602 -2.82,1.655 -2.96,1.655 -3.088,1.602 -3.187,1.503 -3.24,1.375 -3.24,1.305 -3.24,1.235 -3.187,1.107 -3.088,1.008 -2.96,0.955 -2.82,0.955 -2.692,1.008 -2.593,1.107 -2.54,1.235 -2.54,1.305 -2.54,1.305
  Keep-Out Layer board cut-out: 3.24,1.305 3.24,1.375 3.187,1.503 3.088,1.602 2.96,1.655 2.821,1.655 2.692,1.602 2.593,1.503 2.54,1.375 2.54,1.305 2.54,1.235 2.593,1.107 2.692,1.008 2.821,0.955 2.96,0.955 3.088,1.008 3.187,1.107 3.24,1.235 3.24,1.305 3.24,1.305
  Multi-Layer pour cut-out: -2.54,1.305 -2.54,1.375 -2.593,1.503 -2.692,1.602 -2.82,1.655 -2.96,1.655 -3.088,1.602 -3.187,1.503 -3.24,1.375 -3.24,1.305 -3.24,1.235 -3.187,1.107 -3.088,1.008 -2.96,0.955 -2.82,0.955 -2.692,1.008 -2.593,1.107 -2.54,1.235 -2.54,1.305 -2.54,1.305
  Multi-Layer pour cut-out: 3.24,1.305 3.24,1.375 3.187,1.503 3.088,1.602 2.96,1.655 2.821,1.655 2.692,1.602 2.593,1.503 2.54,1.375 2.54,1.305 2.54,1.235 2.593,1.107 2.692,1.008 2.821,0.955 2.96,0.955 3.088,1.008 3.187,1.107 3.24,1.235 3.24,1.305 3.24,1.305
  silkscreen extent -4.5,-4.97 4.5,0.59, body extent -4.47,-5.07 4.47,2.74, height 3.16
VDFN-8 [mil]
  oval 14x28 smd: 1(-38.39,-56.4) 2(-12.79,-56.4) 3(12.8,-56.4) 4(38.39,-56.4) 5(38.39,56.4) 6(12.8,56.4) 7(-12.79,56.4) 8(-38.39,56.4)
  rect 94.49x62.99 smd: 9(0,0)
  silkscreen extent -64,-79 59,59, body extent -59,-59 59,59, height 33
VSON-8 [mm]
  rect 1.372x0.71 smd paste-2: 1(-2.77,-0.635) 1(-2.77,0.635) 1(-2.77,1.905) 2(-2.77,-1.905)
  rect 1x1 smd paste-1 mask+0: 3(0,0)
  Top Layer region: 3.456,1.55 2.866,1.55 2.866,0.99 3.456,0.99 3.456,0.28 2.866,0.28 2.866,-0.28 3.456,-0.28 3.456,-0.99 2.866,-0.99 2.866,-1.55 3.456,-1.55 3.456,-2.26 -0.984,-2.26 -0.984,2.26 3.456,2.26
  body extent -3.05,-2.63 3.05,2.65, height 1.01

## Part data
C1 C2 C3 C4 C5 C6 C7 C8 C9 C10 C15 C16 C17 C18 C19 C20 C21 C28 C35 C36 C37 C38 C39 C40 C41 C42: library part CAP, "贴片电容"
C11 C12 C13 C14: library part C0603, "0603贴片电容"
C22 C23 C24 C25 C26 C27 C29 C30 C31 C32 C33 C34: library part C1206, "1206贴片电容"
D1 D2 D3 D4 D5 D6: "肖特基二极管", Average Rectified Current (Io)=1A, Forward Voltage (Vf@If)=600mV@1A, JLCPCB Part Class=基础库, LCSC Part Name="电压:40V 电流:1A", Manufacturer=Hottech(合科泰), Reverse Voltage (Vr)=40V, Add into BOM=yes, Convert to PCB=yes, Datasheet=https://atta.szlcsc.com/upload/public/pdf/source/20220428/3CB86FD8D28D653594B4E35F9D5AEFD9.pdf, Device=1N5819WS_C191023, Manufacturer Part=1N5819WS, Supplier=LCSC, Supplier Footprint=SOD-323, Supplier Part=C191023, Symbol=1N5819WS
D7: "USB 2.0高速接口的ESD保护"
L1 L2: library part IND, "功率电感"
LED4: Emitted Color=RGB三色, Forward Current=20mA, JLCPCB Part Class=扩展库, LCSC Part Name="RGB三色 正贴 幻彩", Manufacturer=XINGLIGHT(成兴光), Manufacturer Part=XL-3528RGBW-WS2812B, Operating Temperature=-25℃~+80℃, Power Dissipation=50mW；50mW；45mW, Add into BOM=yes, Convert to PCB=yes, Datasheet=https://atta.szlcsc.com/upload/public/pdf/source/20221102/50F456983F591359B0D81AA557777463.pdf, Device=XL-3528RGBW-WS2812B, Diode Configuration=-, Dominant Wavelength=618nm~623nm；520nm~525nm；467nm~472nm, Mounting Sytle=正贴, Peak Wavelength=525nm；623nm；472nm, Supplier=LCSC, Supplier Footprint=SMD3528-4P, Supplier Part=C2890364, Symbol=XL-3528RGBW-WS2812B, Viewing Angle=120°
Q1 Q2 Q3 Q4 Q5 Q6: Package="VSON-CLIP-8 Texas Instruments", Check_prices=https://www.snapeda.com/parts/CSD18540Q5B/Texas+Instruments/view-part/?ref=eda, MF="Texas Instruments", MP=CSD18540Q5B, SnapEDA_Link=https://www.snapeda.com/parts/CSD18540Q5B/Texas+Instruments/view-part/?ref=snap
R1 R2 R3 R4 R5 R6 R7 R8 R9 R10 R11 R12 R13 R14 R15 R16 R17 R18 R19 R20 R21 R22 R23 R24 R25 R29 R30 R31 R32 R33 R34 R35 R36 R37 R38 R39 R40 R41 R42 R43 R44 R45 R46 R47 R48 R49 R50 R51 R52 R53: library part RES, "贴片电阻"
R26 R27 R28: library part R2512, "2512贴片电阻"
U1: Package=None, Availability=Unavailable, MF="{'manufacturer': u'STMicroelectronics'}", MP=STM32G474RET6, Price=None
U2 U3: "60V Buck"
U4: Dropout Voltage=400mV@(500mA), JLCPCB Part Class=扩展库, LCSC Part Name="输入5.5V 输出3.3V 500mA", Manufacturer=RICHTEK(立锜), Manufacturer Part=RT9013-33GB, Maximum Input Voltage=5.5V, Operating Temperature=-40℃~+85℃, Output Current=500mA, Output Voltage=3.3V, Power Supply Rejection Ratio (PSRR)=50dB@(10kHz), Quiescent Current (Ground Current)=50uA, Add into BOM=yes, Convert to PCB=yes, Datasheet=https://atta.szlcsc.com/upload/public/pdf/source/20150504/1457707282459.pdf, Device=RT9013-33GB, Feature=-, Noise=-, Number of Outputs=1, Output Polarity=正, Output Type=固定, Supplier=LCSC, Supplier Footprint=SOT-23-5, Supplier Part=C47773, Symbol=RT9013-33GB
U5: library part LP5907MFX-3.3, Dropout Voltage=400mV@(500mA), JLCPCB Part Class=扩展库, LCSC Part Name="输入5.5V 输出3.3V 500mA", Manufacturer=RICHTEK(立锜), Manufacturer Part=RT9013-33GB, Maximum Input Voltage=5.5V, Operating Temperature=-40℃~+85℃, Output Current=500mA, Output Voltage=3.3V, Power Supply Rejection Ratio (PSRR)=50dB@(10kHz), Quiescent Current (Ground Current)=50uA, Add into BOM=yes, Convert to PCB=yes, Datasheet=https://atta.szlcsc.com/upload/public/pdf/source/20150504/1457707282459.pdf, Device=RT9013-33GB, Feature=-, Noise=-, Number of Outputs=1, Output Polarity=正, Output Type=固定, Supplier=LCSC, Supplier Footprint=SOT-23-5, Supplier Part=C47773, Symbol=RT9013-33GB
U6: JLCPCB Part Class=扩展库, Manufacturer=Infineon(英飞凌), Add into BOM=yes, Convert to PCB=yes, Datasheet=https://atta.szlcsc.com/upload/public/pdf/source/20170728/C123083_1501225763065848823.pdf, Device=TLE5012BE1000, LCSC Part Name=TLE5012BE1000, Manufacturer Part=TLE5012BE1000, Rotation Angle=0°~360°, Supplier=LCSC, Supplier Footprint=SO-8, Supplier Part=C123083, Symbol=TLE5012BE1000XUMA1
U7: "三相栅极驱动", Package=None, Availability=Unavailable, MF="{'manufacturer': u'Fortior Tech'}", MP=FD6288Q, Price=None
U10: JLCPCB Part Class=扩展库, LCSC Part Name="5Mbps 4.5V~5.5V", Manufacturer=NXP(恩智浦), Manufacturer Part=TJA1051T/1J, Operating Temperature=-40℃~+150℃, Supply Voltage=4.5V~5.5V, Add into BOM=yes, Convert to PCB=yes, Data Rate=5Mbps, Datasheet=https://atta.szlcsc.com/upload/public/pdf/source/20170810/C124020_1502335225901879762.pdf, Device=TJA1051T/1J, Supplier=LCSC, Supplier Footprint=SOIC-8, Supplier Part=C92211, Symbol=TJA1051T/1J, type=收发器
USB1: Current Rating - Power (Max)=5A, JLCPCB Part Class=扩展库, LCSC Part Name="TYPE-C母座 16P 4脚插件带定位柱 不锈钢外壳 2次模顶", Manufacturer="SHOU HAN(首韩)", Manufacturer Part="TYPE-C 16PIN 2MD(073)", Operating Temperature Range=-25℃~+85℃, Add into BOM=yes, Connector Type=Type-C, Convert to PCB=yes, Device="TYPE-C 16PIN 2MD(073)", Gender=母座, Mounting Style=卧贴, Number of Contacts=16, Number of Ports=1, Standard=-, Supplier=LCSC, Supplier Footprint=SMD, Supplier Part=C2765186, Symbol="TYPE-C 16PIN 2MD(073)"
X1: library part OSC-3213, "无源晶振"

## Free pads (board coordinates)
  round 5 hole 3.2: 11(3,3) 11(3,47) 11(47,3) 11(47,47)

## Via types
v1: diameter 0.508, hole 0.305, Top Layer to Bottom Layer, tented both sides, 297 vias
v2: diameter 0.61, hole 0.406, Top Layer to Bottom Layer, tented both sides, 12 vias
v3: diameter 1.5, hole 1, Top Layer to Bottom Layer, tented both sides, 1 vias

## Nets (pads, with @x,y where several pads share a name; then routed paths per layer and width w, separated by ;. In a path a pad name is that pad's centre, name@x,y a point inside that pad or via, vN(x,y) a via of type N, cw(c..) or ccw(c..) an arc to the next point about the centre after c; other vN are vias at no path point)
5V: C3.1 C4.1 C9.1 C15.1 C17.1 C38.1 D6.1 L1.2 LED4.3 R1.2 U4.1 U4.3 U5.1 U5.3 U10.3 | length 102.1
  Top Layer w0.254: LED4.3@2.655,24.995 2.655,24.845 3.251,24.249 C17.1@4.191,24.249 4.191,25.527 v1(3.302,26.416) ; U10.3@11.593,40.711 12.751,40.711 13.179,41.14 C38.1@13.208,41.14 v1(13.208,42.037) ; U5.3@32.832,37.849 32.832,36.891 33.274,36.449 34.29,36.449 34.732,36.891 U5.1@34.732,37.849 ; U4.3@36.642,37.849 36.642,36.891 37.084,36.449 38.1,36.449 38.542,36.891 U4.1@38.542,37.849 ; R1.2@42.41,40.894 44.188,40.894 C4.1@44.196,40.886
  Top Layer w0.381: D6.1@30.988,35.276 v2(30.988,36.322) ; v2(34.536,41.14) C9.1@34.536,39.37 34.536,38.32 34.732,38.124 U5.1@34.732,37.849 ; v2(38.346,41.14) C15.1@38.346,39.37 38.346,38.32 38.542,38.124 U4.1@38.542,37.849
  Power w0.381: v1(3.302,26.416) 2.413,27.305 2.413,40.132 3.556,41.275 5.334,41.275 6.604,42.545 6.604,45.847 7.493,46.736 22.86,46.736 23.749,45.847 23.749,42.037 26.416,39.37 30.988,39.37 ; v2@30.988,36.449 30.988,39.37 ; v2(34.536,41.14) 34.536,40.14 34.544,40.132 ; v2(38.346,41.14) 38.346,40.14 38.354,40.132 ; v2(45.085,40.886) 44.331,40.132 38.354,40.132 ; 30.988,39.37 31.75,40.132 34.544,40.132 ; 34.544,40.132 38.354,40.132
  Bottom Layer w0.254: v1(13.208,42.037) v1(13.208,46.736)
ADC_IA: C36.2 R35.2 U1.13 | length 13.6
  Top Layer w0.152: R35.2@7.35,26.289 C36.2@9.922,26.289 9.922,27.067 10.541,27.686 15.367,27.686 15.792,28.111 U1.13@15.792,32.06
ADC_IB: C37.2 R36.2 U1.14 | length 8.8
  Top Layer w0.152: R36.2@14.716,26.289 C37.2@17.288,26.289 17.288,27.162 16.292,28.158 U1.14@16.292,32.06
ADC_IC: C39.2 R47.2 U1.16 | length 14.7
  Top Layer w0.152: U1.16@17.292,32.06 17.292,28.809 18.288,27.813 18.796,27.305 24.384,27.305 24.683,27.006 C39.2@24.683,26.289 R47.2@22.082,26.289
ADC_TEMP: C40.1 CN10.1 R52.2 U1.11 | length 28.5
  Top Layer w0.152: C40.1@12.438,33.782 v1(13.335,33.782) 13.807,33.31 U1.11@15.042,33.31
  Bottom Layer w0.152: CN10.1@1.016,22.733 R52.2@2.278,22.733 ; R52.2@2.286,22.741 2.286,21.717 2.921,21.082 6.096,21.082 6.858,21.844 6.858,25.654 8.001,26.797 8.001,33.401 9.017,34.417 12.7,34.417 v1(13.335,33.782)
  Bottom Layer w0.254: CN10.1@0.889,22.606 CN10.1@1.016,22.733 ; R52.2@2.278,22.733 R52.2@2.286,22.741
ADC_VBUS: C35.2 R32.1 R40.2 U1.12 | length 5.9
  Top Layer w0.152: R32.1@12.438,29.21 R40.2@12.438,30.734 C35.2@12.438,32.258 13.462,32.258 14.014,32.81 U1.12@15.042,32.81
AVCC_3.3: C11.1 C16.1 R45.2 U1.20 U1.21 U5.5 U8.5 U9.5 U11.5 U12.5 | length 56.8
  Top Layer w0.152: v1(10.036,24.133) U8.5@10.036,24.826 ; v1(17.402,24.133) U9.5@17.402,24.826 ; v1(24.768,24.133) U11.5@24.768,24.826
  Top Layer w0.254: U1.20@19.292,32.06 v1(19.292,30.861) ; C11.1@19.304,30.091 C11.1@19.292,30.091 19.275,30.091 19.292,30.108 v1(19.292,30.861) ; U1.21@19.792,32.06 19.792,31.058 19.643,30.91 19.341,30.91 v1(19.292,30.861) ; v1(28.575,33.589) U12.5@29.467,33.589 ; R45.2@30.853,30.226 32.893,30.226 33.274,30.607 v2(33.274,31.242)
  Top Layer w0.381: v2(33.274,31.242) 33.274,32.237 34.536,33.499 C16.1@34.536,33.528 34.536,34.578 34.732,34.774 U5.5@34.732,35.049
  Power w0.254: 17.399,26.162 17.402,26.159 ; v1(28.575,33.589) 29.403,33.589 29.718,33.274 29.718,32.639
  Power w0.381: v1(10.036,24.133) 10.036,25.53 10.668,26.162 17.399,26.162 21.717,26.162 ; v1(17.402,24.133) 17.402,26.159 ; v1(24.768,24.133) 24.768,25.397 24.003,26.162 21.717,26.162 ; v2(33.274,31.242) 33.274,31.75 32.385,32.639 29.718,32.639 28.956,31.877 22.479,31.877 21.717,31.115 21.717,30.214 21.717,26.162
  Power w0.406: v1(19.292,30.861) 19.939,30.214 21.717,30.214
BRD_ENC_CS: U1.25 U6.3 | length 8.6
  Top Layer w0.152: U1.25@22.042,32.81 22.074,32.778 22.399,32.778 22.86,32.317 22.86,29.337 24.13,28.067 25.146,28.067 v1(25.631,28.552)
  Bottom Layer w0.152: U6.3@25.631,27.496 v1(25.631,28.552)
CAN_H: CN11.1 R53.1 U10.7 | length 4.9
  Top Layer w0.152: CN11.1@4.572,39.761 5.08,39.761 5.578,40.259 6.239,40.259 R53.1@6.866,39.632 ; R53.1@6.894,39.632 6.923,39.632 7.55,40.259 8.297,40.259 8.495,40.061 U10.7@8.727,40.061
CAN_L: CN11.2 R53.2 U10.6 | length 5
  Top Layer w0.152: CN11.2@4.572,41.011 5.08,41.011 5.578,40.513 6.267,40.513 6.539,40.785 6.539,40.813 6.866,41.14 R53.2@6.894,41.14 6.923,41.14 7.551,40.513 8.296,40.513 8.495,40.711 U10.6@8.727,40.711
DCBUS: C1.1 C2.1 C5.1 C6.1 C22.1 C23.1 C24.1 C25.1 C26.1 C27.1 C29.1 C30.1 C31.1 C32.1 C33.1 C34.1 CN3.1 Q1.3 Q2.3 Q3.3 R3.1 R4.1 R32.2 U2.5 U3.5 | length 23.8
  Top Layer w0.152: v1(10.16,29.21) R32.2@10.93,29.21
  Power w0.152: v1(7.239,11.176) 6.223,12.192 6.223,19.558 5.207,20.574 5.207,26.67 6.096,27.559 9.652,27.559 10.16,28.067 v1(10.16,29.21)
  other v1: 7.239,9.398 8.17,9.398 9.102,9.398 10.033,9.398 20.828,9.398 21.759,9.398 22.691,9.398 23.622,9.398 34.417,9.398 35.348,9.398 36.28,9.398 37.211,9.398 7.239,10.287 8.17,10.287 9.102,10.287 10.033,10.287 20.828,10.287 21.759,10.287 22.691,10.287 23.622,10.287 34.417,10.287 35.348,10.287 36.28,10.287 37.211,10.287 46.863,10.287 47.752,10.287 8.17,11.176 9.102,11.176 10.033,11.176 20.828,11.176 21.759,11.176 22.691,11.176 23.622,11.176 34.417,11.176 35.348,11.176 36.28,11.176 37.211,11.176 46.863,11.176 47.752,11.176 44.196,21.209 44.958,21.209 44.196,21.971 44.958,21.971 44.196,32.131 44.958,32.131 44.196,32.893 44.958,32.893
DN: D7.6 USB1.5 USB1.7 | length 10.1
  Top Layer w0.152: D7.6@27.117,37.846 27.117,38.121 27.813,38.817 27.813,40.386 29.214,41.787 v1(29.214,43.557) ; USB1.5@30.214,42.561 v1(30.214,43.557)
  Bottom Layer w0.152: v1(29.214,43.557) 29.214,44.2 29.464,44.45 29.972,44.45 30.226,44.196 30.226,43.569 v1(30.214,43.557)
DP: D7.4 USB1.6 USB1.8 | length 10.1
  Top Layer w0.152: USB1.8@28.714,42.561 28.714,44.208 28.956,44.45 29.464,44.45 29.714,44.2 USB1.6@29.714,42.561 29.714,41.525 28.309,40.12 28.309,38.829 29.017,38.121 D7.4@29.017,37.846
EXT_ENC_CS: R13.1 U1.40 | length 20.4
  Top Layer w0.152: R13.1@8.374,29.21 9.144,29.21 9.398,29.464 v1(9.398,29.845) ; U1.40@19.792,39.06 v1(19.792,39.751)
  Bottom Layer w0.152: v1(9.398,29.845) 10.16,30.607 17.018,30.607 19.304,32.893 19.304,38.735 19.792,39.223 v1(19.792,39.751)
FDCAN1_RX: U1.46 U10.4 | length 8.2
  Top Layer w0.152: U10.4@11.593,41.361 v1(11.593,42.037) ; U1.46@16.792,39.06 v1(16.792,40.132)
  Bottom Layer w0.152: v1(11.593,42.037) 11.593,41.311 12.263,40.64 16.284,40.64 v1(16.792,40.132)
FDCAN1_TX: U1.47 U10.1 | length 7.3
  Top Layer w0.152: v1(11.593,38.735) U10.1@11.593,39.411 ; v1(16.002,40.132) 16.292,39.842 U1.47@16.292,39.06
  Bottom Layer w0.152: v1(11.593,38.735) 11.593,39.533 12.192,40.132 v1(16.002,40.132)
GH_A: R20.1 U7.13 | length 36.3
  Top Layer w0.254: R20.1@12.319,8.235 v1(12.319,10.287) ; v1(30.099,20.828) 30.099,23.622 30.353,23.876 31.623,23.876 33.56,25.813 U7.13@34.691,25.813
  Power w0.254: v1(12.319,10.287) 13.081,11.049 13.081,12.065 14.605,13.589 14.605,19.05 15.621,20.066 29.337,20.066 v1(30.099,20.828)
GH_B: R21.1 U7.16 | length 24
  Top Layer w0.254: R21.1@25.908,8.235 v1(25.908,10.287) ; v1(34.036,20.828) 34.036,23.622 34.29,23.876 35.433,23.876 36.191,24.634 U7.16@36.191,25.813
  Power w0.254: v1(25.908,10.287) 26.67,11.049 26.67,12.065 28.194,13.589 28.194,17.526 29.21,18.542 31.75,18.542 v1(34.036,20.828)
GH_C: R22.1 U7.19 | length 23.4
  Top Layer w0.254: U7.19@37.941,26.563 38.715,26.563 39.243,26.035 39.243,25.019 37.973,23.749 v1(37.973,20.828) ; R22.1@39.497,8.235 v1(39.497,10.287)
  Power w0.254: v1(37.973,20.828) 39.37,19.431 41.148,19.431 41.783,18.796 41.783,13.462 40.259,11.938 40.259,11.049 v1(39.497,10.287)
GL_A: R23.1 U7.9 | length 34.8
  Top Layer w0.254: v1(32.639,28.448) 33.024,28.063 U7.9@33.941,28.063
  Power w0.254: v1(12.319,11.222) 12.319,12.065 14.097,13.843 14.097,19.304 15.367,20.574 26.797,20.574 27.356,21.133 27.356,23.038 28.067,23.749 29.718,23.749 30.607,24.638 30.607,26.416 v1(32.639,28.448)
GL_B: R24.1 U7.10 | length 21.2
  Top Layer w0.254: v1(32.639,27.563) U7.10@33.941,27.563
  Power w0.254: v1(25.908,11.222) 25.908,12.065 27.686,13.843 27.686,17.78 28.956,19.05 30.353,19.05 31.242,19.939 31.242,26.166 v1(32.639,27.563)
GL_C: R25.1 U7.11 | length 24.4
  Top Layer w0.254: v1@32.639,26.67 v1(32.639,26.678) 33.024,27.063 U7.11@33.941,27.063
  Power w0.254: v1(32.639,26.678) 31.877,25.916 31.877,24.638 33.02,23.495 34.417,23.495 35.56,22.352 36.703,22.352 37.338,21.717 37.338,20.701 39.116,18.923 40.894,18.923 41.275,18.542 41.275,13.716 39.497,11.938 v1(39.497,11.222)
GND: C1.2 C2.2 C3.2 C4.2 C5.2 C6.2 C7.2 C8.2 C9.2 C10.2 C11.2 C12.2 C13.2 C14.2 C15.2 C16.2 C17.2 C18.1 C19.2 C35.1 C36.1 C37.1 C38.2 C39.1 C40.2 C41.1 C42.1 CN1.1 CN2.1 CN9.1 D1.2 D2.2 D7.2 LED4.1 NT1.1 R5.1 R6.1 R7.2 R29.1 R39.1 R40.1 R51.1 R52.1 U1.49 U2.2 U3.2 U4.2 U5.2 U6.7 U7.6 U7.25 U8.2 U9.2 U10.2 U10.8 U10.9 U11.2 U12.2 USB1.1 USB1.12 USB1.13 USB1.14 X1.2 | length 50.9
  Top Layer w0.152: U8.2@7.236,23.876 v1(8.128,23.876) ; v1(10.16,32.258) C35.1@10.93,32.258 ; R40.1@10.93,30.734 C35.1@10.93,32.258 ; C40.2@10.93,33.782 C35.1@10.93,32.258 ; C36.1@11.43,26.289 v1(11.43,27.051) ; U9.2@14.602,23.876 v1(15.494,23.876) ; v1(18.796,25.44) C37.1@18.796,26.289 ; U11.2@21.968,23.876 v1(22.835,23.876) ; C39.1@26.191,26.26 v1(27.051,25.4) ; v1(35.56,41.783) R39.1@35.56,42.68 ; R29.1@35.56,47.49 v1(35.56,48.387) ; v1(37.338,41.783) R7.2@37.338,42.68
  Top Layer w0.254: v1(1.155,20.967) LED4.1@1.155,21.995 ; v1(3.352,28.371) CN2.1@4.572,28.371 ; v1(4.191,21.844) C17.2@4.191,22.741 ; v1(5.969,36.83) C18.1@6.866,36.83 ; v1(7.874,45.466) CN9.1@9.047,45.466 ; v1(8.727,38.735) U10.8@8.727,39.411 ; U10.2@11.593,40.061 12.75,40.061 13.179,39.632 C38.2@13.208,39.632 v1(13.208,38.735) ; X1.2@11.684,36.703 v1(12.827,36.703) ; v1(14.486,42.664) C14.2@15.24,42.664 ; v1(16.764,45.466) CN1.1@17.937,45.466 ; v1(19.304,27.813) C11.2@19.304,28.583 ; v1(20.828,27.813) C12.2@20.828,28.583 ; C13.2@24.011,39.608 v1(25.019,39.608) ; R51.1@25.273,33.393 25.302,33.393 26.056,32.639 U12.2@26.667,32.639 v1(27.559,32.639) ; C41.1@25.281,30.226 v1(25.281,30.98) ; C39.1@26.191,26.26 C39.1@26.191,26.289 ; v1(28.067,34.163) D7.2@28.067,35.052 ; C42.1@30.861,33.393 v1(30.861,34.163) ; v1(32.004,33.909) 32.385,33.528 C16.2@33.028,33.528 ; v1(32.131,39.37) C9.2@33.028,39.37 ; v1(33.782,37.084) U5.2@33.782,37.849 ; v1(34.036,31.877) C19.2@34.933,31.877 ; v1(35.814,33.909) 36.195,33.528 C10.2@36.838,33.528 ; v1(35.941,39.37) C15.2@36.838,39.37 ; v1(37.592,37.084) U4.2@37.592,37.849 ; v1(40.132,21.082) C6.2@40.902,21.082 ; v1(40.152,32.017) 40.889,32.017 C2.2@40.902,32.004 ; v1(48.895,20.193) C5.2@48.895,21.463 ; C3.2@48.895,40.513 v1(48.895,41.783)
  Top Layer w0.381: USB1.14@25.139,43.111 25.414,42.836 26.154,42.836 26.264,42.726 USB1.12@26.264,42.561 ; USB1.1@32.664,42.561 32.664,42.726 32.774,42.836 33.514,42.836 USB1.13@33.789,43.111 ; U7.6@34.691,29.813 34.691,30.5 34.925,30.734 34.925,31.615 C19.2@34.933,31.623
  Top Layer w0.762: v3@48.641,30.788 v3(48.641,30.988)
  Gnd w0.762: NT1.1@41.656,19.71 41.656,20.345
  Bottom Layer w0.254: v1(2.286,23.55) R52.1@2.286,24.249 ; v1(22.835,23.876) 24.003,23.876 24.361,23.518 U6.7@24.361,22.496
  other v1: 43.307,26.7 16.002,27.051 35.433,27.305 36.449,27.305 17.78,27.432 43.307,27.559 35.433,28.194 36.449,28.194 11.684,28.321 13.363,28.321 15.042,28.321 43.307,28.456 15.113,29.591 17.292,34.31 19.792,34.31 17.292,36.81 19.792,36.81 43.299,37.622 43.299,38.481 43.299,39.378 10.16,40.386
IA_N: NT2.1 R33.1 | length 10.9
  Top Layer w0.152: R33.1@9.914,21.463 9.144,21.463 8.89,21.209 8.89,20.066 9.398,19.558 14.986,19.558 15.621,18.923 NT2.1@15.621,17.526
IA_P: NT5.1 R37.1 | length 10.9
  Top Layer w0.152: R37.1@7.358,21.463 8.128,21.463 8.382,21.209 8.382,19.812 9.144,19.05 14.732,19.05 15.113,18.669 NT5.1@15.113,17.526
IB_N: NT3.1 R34.1 | length 16.4
  Top Layer w0.152: R34.1@17.28,21.463 16.51,21.463 16.256,21.209 16.256,20.32 17.145,19.431 27.813,19.431 29.21,18.034 NT3.1@29.21,17.526
IB_P: NT6.1 R38.1 | length 16.4
  Top Layer w0.152: R38.1@14.724,21.463 15.494,21.463 15.748,21.209 15.748,20.066 16.891,18.923 27.559,18.923 28.702,17.78 NT6.1@28.702,17.537
IC_N: NT4.1 R44.1 | length 22.9
  Top Layer w0.152: R44.1@24.682,21.463 23.876,21.463 23.622,21.209 23.622,20.955 24.003,20.574 28.829,20.574 29.845,19.558 42.037,19.558 42.819,18.776 NT4.1@42.819,17.347
IC_P: NT7.1 R48.1 | length 22.9
  Top Layer w0.152: R48.1@22.054,21.463 R48.1@22.082,21.463 22.86,21.463 23.114,21.209 23.114,20.701 23.749,20.066 28.575,20.066 29.591,19.05 41.783,19.05 42.311,18.522 NT7.1@42.311,17.347
LED_G: R8.2 U1.39 | length 23
  Top Layer w0.152: U1.39@20.292,39.06 v1(20.292,40.239) ; v1(39.378,42.68) R8.2@40.259,42.68
  Bottom Layer w0.152: v1(20.292,40.239) 20.3,40.239 20.574,40.513 20.955,40.513 38.608,40.513 39.378,41.283 v1(39.378,42.68)
LED_R: R9.2 U1.38 | length 25.2
  Top Layer w0.152: U1.38@20.792,39.06 v1(20.792,39.751) ; v1(42.299,42.68) R9.2@43.18,42.68
  Bottom Layer w0.152: v1(20.792,39.751) 21.173,40.132 21.717,40.132 41.275,40.132 42.299,41.156 v1(42.299,42.68)
NetC41_2: C41.2 R45.1 R51.2 U12.3 | length 5.6
  Top Layer w0.254: R51.2@25.286,31.872 R51.2@25.273,31.885 25.469,31.689 U12.3@26.667,31.689 26.667,30.348 C41.2@26.789,30.226 R45.1@29.345,30.226